# EAGLE board MechModule (EAGLE 6.6.0)
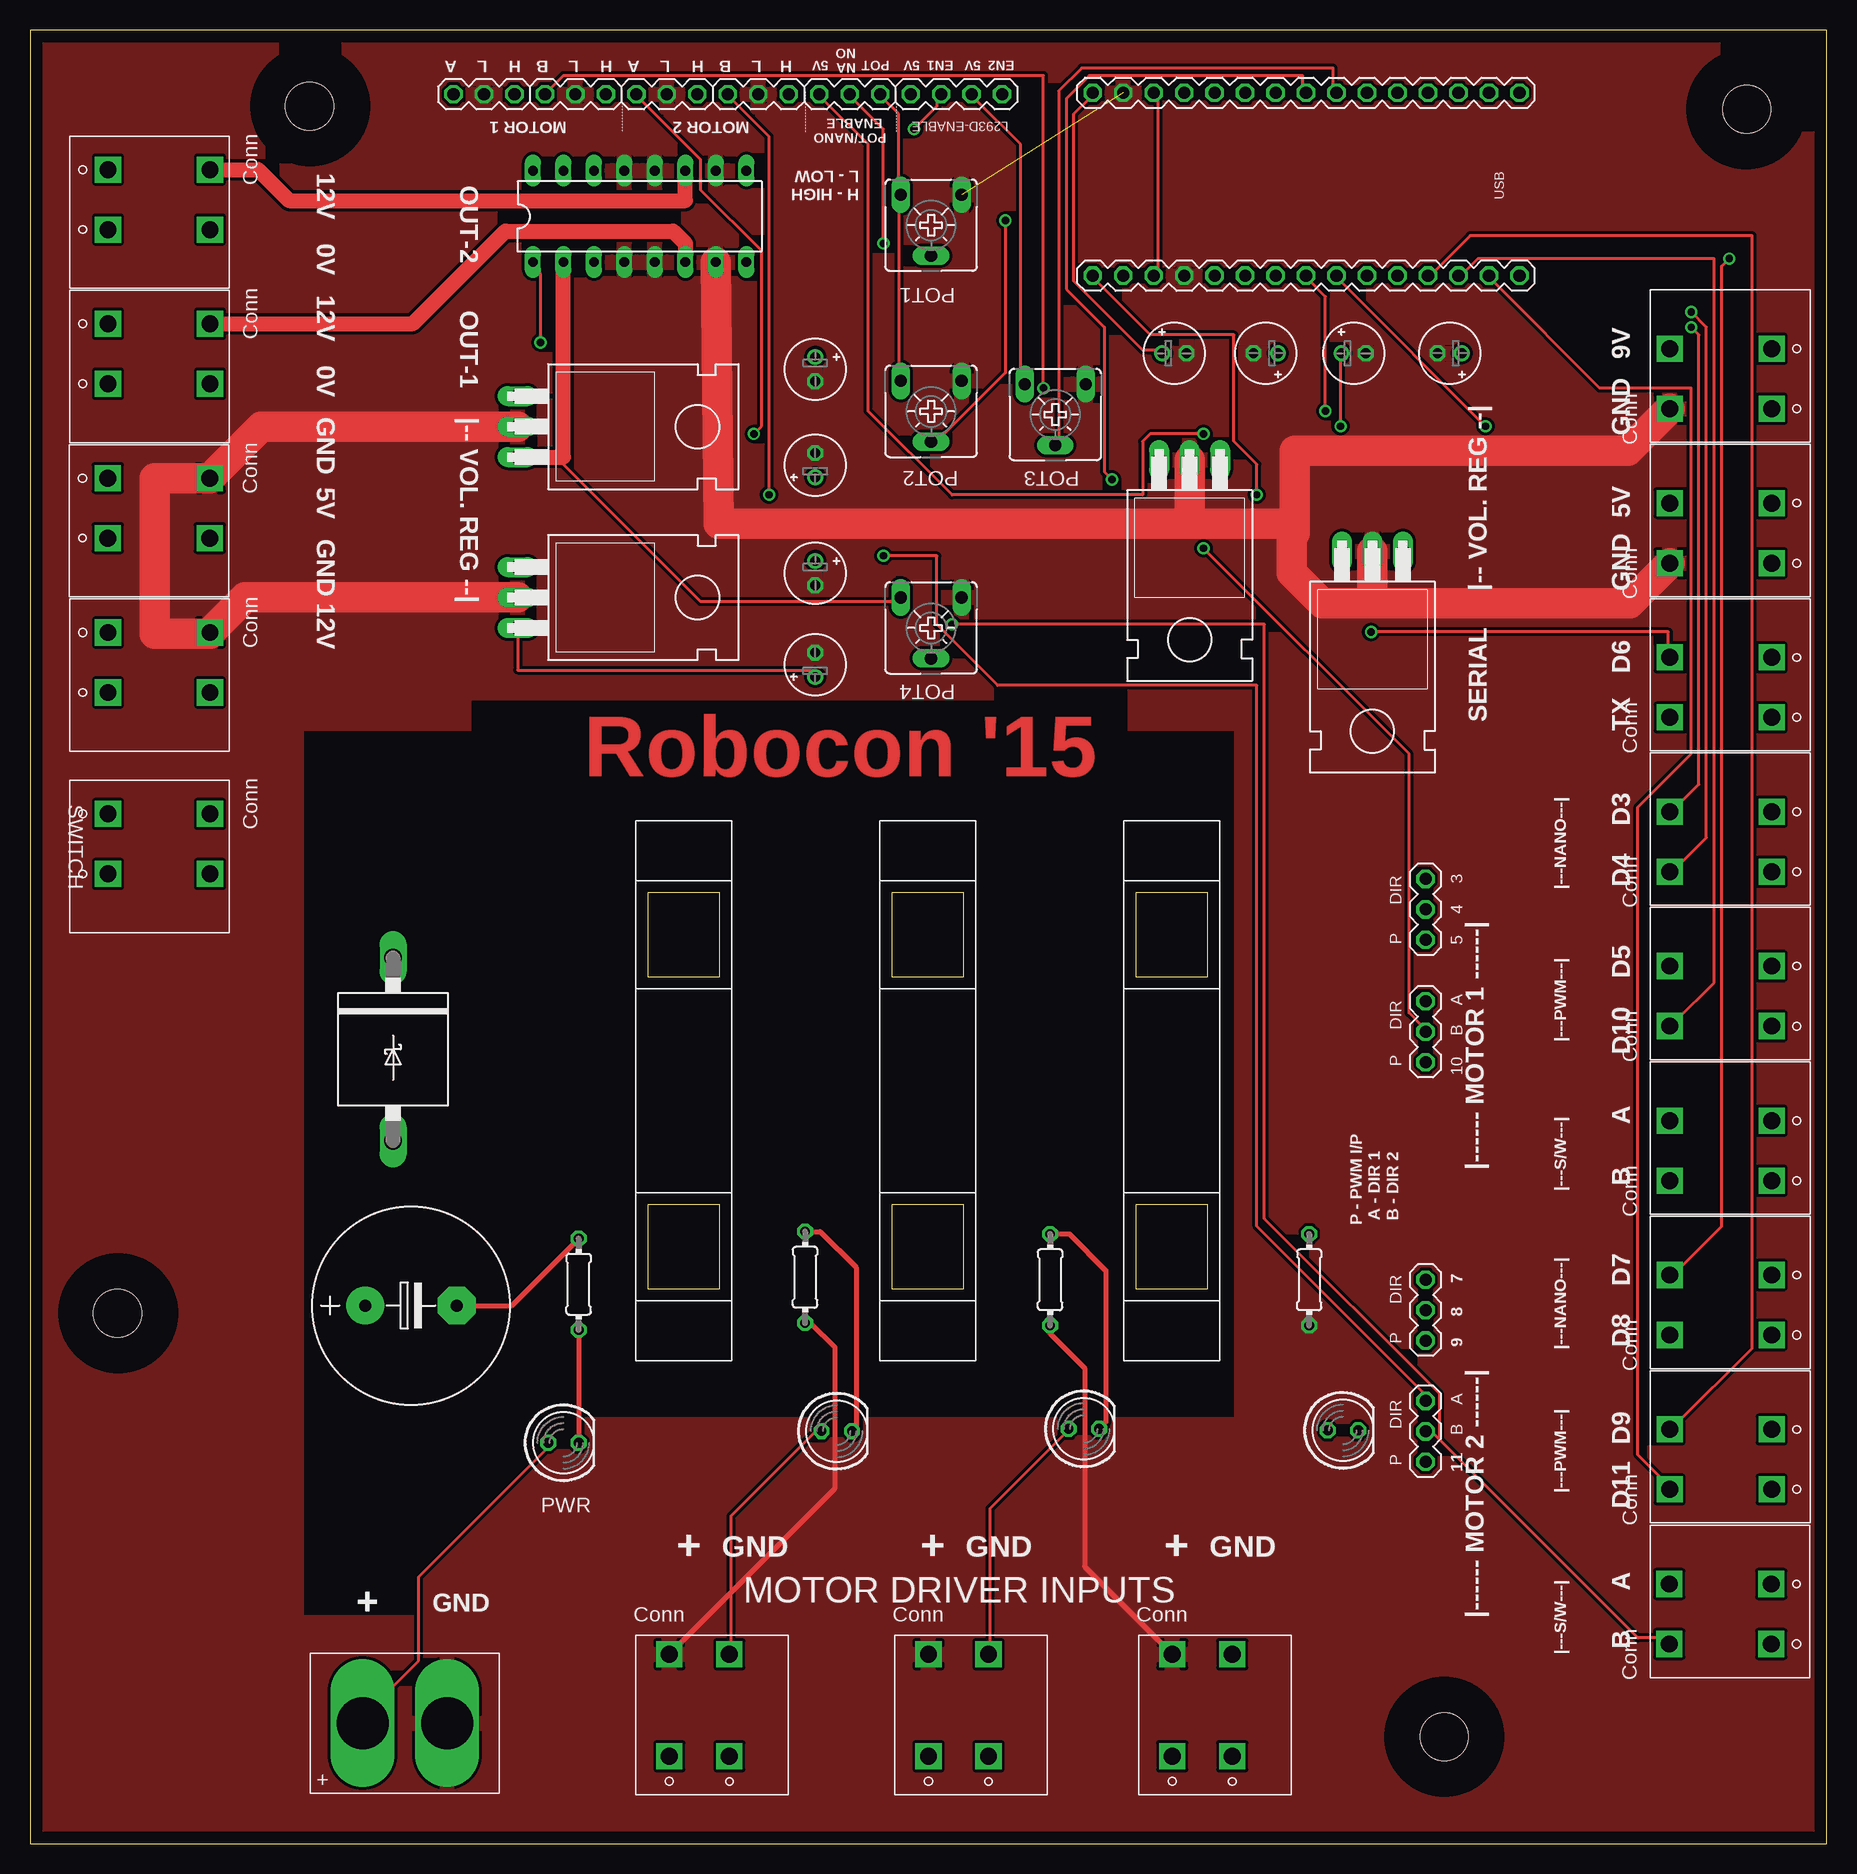
[diagram p0: board, top side]
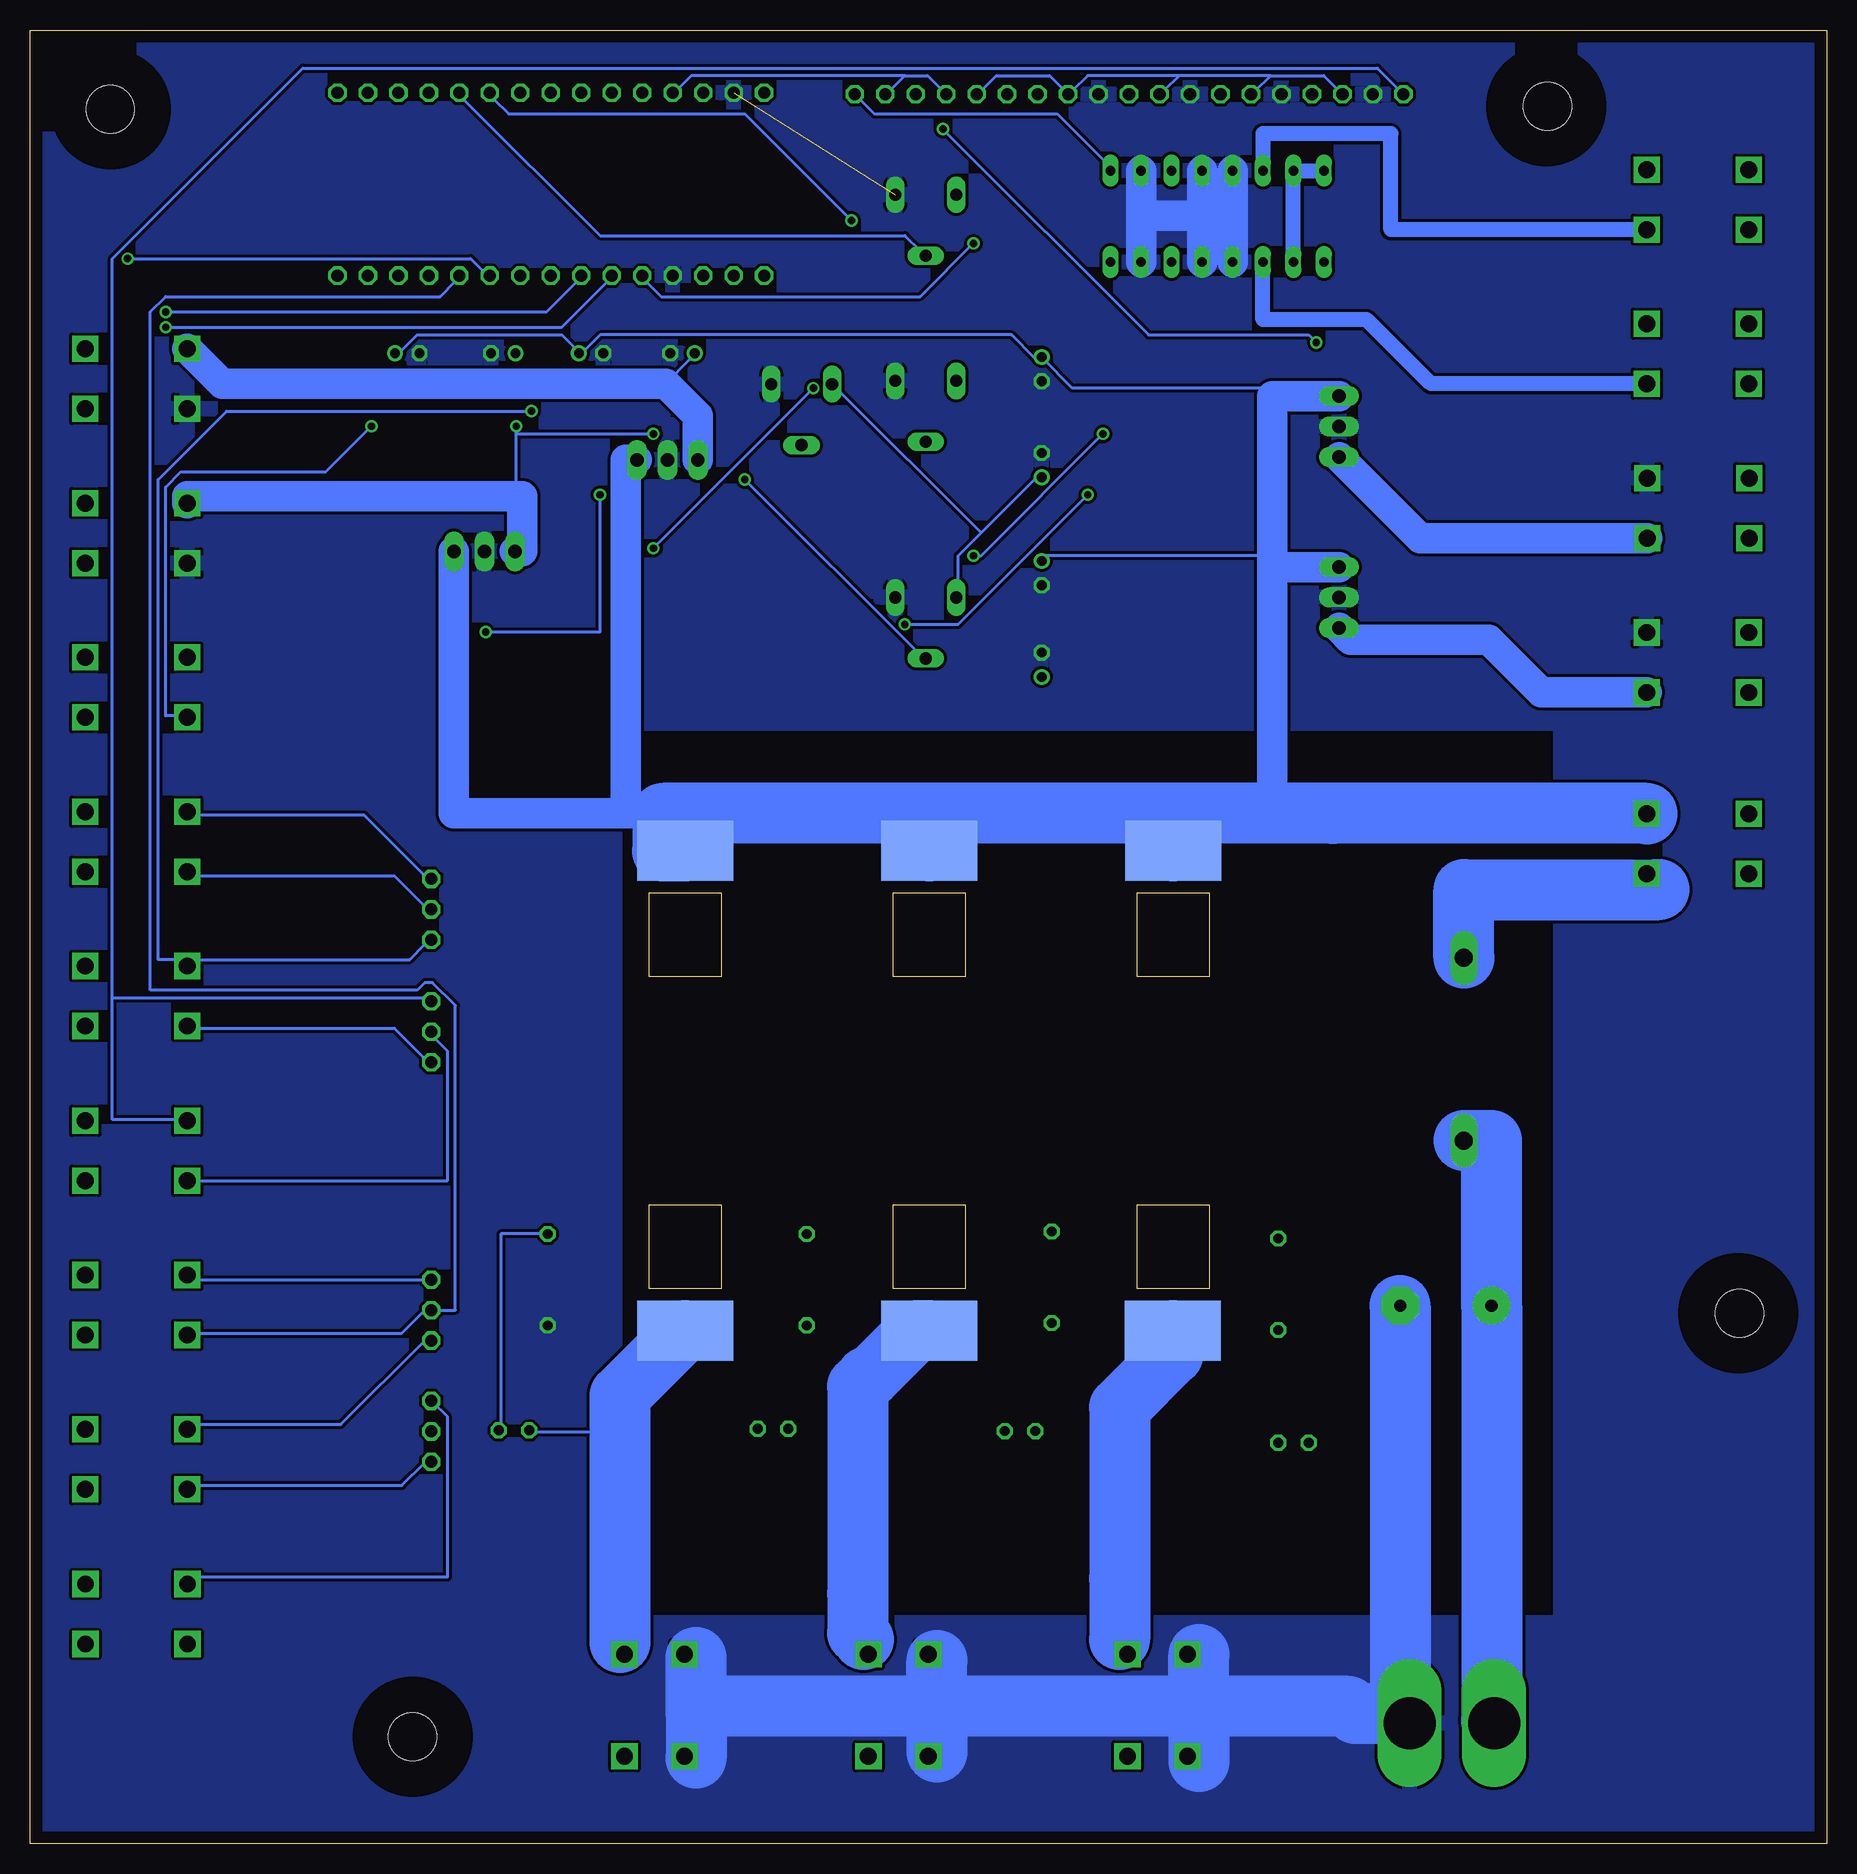
[diagram p1: board, bottom side, seen from below]

Size 149.74 x 151.13 mm. Coordinates in mm from the lower left corner, seen from the top.
Outline: 0,0 149.74,0 149.74,151.13 0,151.13 0,0
Copper layers (1*16): Top 0.035mm / dielectric 1.5mm / Bottom 0.035mm
Design rules "default *": minimum track width 10mil, minimum drill 24mil, track to track 10mil, track to pad 10mil, pad to pad 10mil, via to via 10mil, smd to smd 6mil, copper to edge 40mil, drill to drill 8mil, minimum pad ring 10mil, minimum via ring 8mil, stop-mask expansion 4mil, vias tented up to drill 0mil, thermal gap 10mil
Net classes: 1 24V|GND: width 5.08 mm, drill 0.61 mm, clearance 0.381 mm
Holes 4 mm at 143.05,144.53 23.29,144.78 117.86,8.89 7.29,44.2
tRestrict: area 138,139.5 to 148,149.5; area 18.4,139.8 to 28.4,149.8; area 112.9,3.9 to 122.9,13.9; area 22.9,35.6 to 100.3,92.7; area 22.9,19.1 to 31.8,35.6; area 36.8,87.6 to 91.4,95.2; area 2.4,39.2 to 12.4,49.2
bRestrict: area 22.9,19.1 to 100.3,92.7; area 138,139.5 to 148,149.5; area 18.4,139.8 to 28.4,149.8; area 112.9,3.9 to 122.9,13.9; area 2.4,39.2 to 12.4,49.2

## Footprints (pad centres in the part's own frame; a part is rotated, then mirrored left to right if it is on the bottom)
STANDARD = drill 1.4 pad 2.184 square: 1 -2.28,-3.15; 2 2.72,-3.15; 3 2.72,5.35; 4 -2.28,5.35
E2-5 = drill 0.813 pad 1.27: + -1.016,0 | drill 0.813 pad 1.27 octagon: - 1.016,0
E7,5-16 = drill 1.016 pad 3.15: + -3.81,0 | drill 1.016 pad 3.15 octagon: - 3.81,0
P6T15 = drill 1.499 long: A 7.62,0; C -7.62,0
MA04-1 = drill 1.016 octagon: 1 -3.81,0; 2 -1.27,0; 3 1.27,0; 4 3.81,0
MA03-1 = drill 1.016 octagon: 1 -2.54,0; 2 0,0; 3 2.54,0
CPT-FUSES = smd 5 x 8 bottom: P$1 -19.492,0.039; P$2 20.502,0.055
78XX = drill 1.118 long: 1 -2.54,-8.89; 2 0,-8.89; 3 2.54,-8.89
DIL16 = drill 0.813 long: 1 -8.89,-3.81; 2 -6.35,-3.81; 3 -3.81,-3.81; 4 -1.27,-3.81; 5 1.27,-3.81; 6 3.81,-3.81; 7 6.35,-3.81; 8 8.89,-3.81; 9 8.89,3.81; 10 6.35,3.81; 11 3.81,3.81; 12 1.27,3.81; 13 -1.27,3.81; 14 -3.81,3.81; 15 -6.35,3.81; 16 -8.89,3.81
SCREW_XT-60 = drill 4.318 long: P$1 -3.524,0; P$2 3.524,0
LED5MM = drill 0.813 octagon: A -1.27,0; K 1.27,0
ARD-NANO = drill 1.016 octagon: 3V3 7.62,-15.24; 5V 7.62,10.16; A0 7.62,-10.16; A1 7.62,-7.62; A2 7.62,-5.08; A3 7.62,-2.54; A4 7.62,0; A5 7.62,2.54; A6 7.62,5.08; A7 7.62,7.62; AREF 7.62,-12.7; D2 -7.62,7.62; D3 -7.62,5.08; D4 -7.62,2.54; D5 -7.62,0; D6 -7.62,-2.54; D7 -7.62,-5.08; D8 -7.62,-7.62; D9 -7.62,-10.16; D10 -7.62,-12.7; D11 -7.62,-15.24; D12 -7.62,-17.78; D13 7.62,-17.78; GND1 -7.62,10.16; GND2 7.62,15.24; RST1 -7.62,12.7; RST2 7.62,12.7; RX -7.62,15.24; TX -7.62,17.78; VIN 7.62,17.78
CA6V = drill 1.016 long: A -2.54,-2.54; E 2.54,-2.54; S 0,2.54
0204/7 = drill 0.813 octagon: 1 -3.81,0; 2 3.81,0

## Placement (x,y rotation side)
5V1  SCREWCONN  [STANDARD]  141.99,108.98 90 top
5V2  SCREWCONN  [STANDARD]  9.63,111.51 270 top
9V  SCREWCONN  [STANDARD]  141.99,121.85 90 top
12V  SCREWCONN  [STANDARD]  9.65,98.64 270 top
C1  [E2-5]  110.3,124.19 0 top
C2  [E2-5]  118.3,124.19 180 top
C4  [E2-5]  65.43,122.87 270 top
C5  [E2-5]  65.43,114.87 90 top
C8  [E2-5]  95.36,124.19 0 top
C9  [E2-5]  102.98,124.19 180 top
C12  [E2-5]  65.43,98.23 90 top
C13  [E2-5]  65.43,105.87 270 top
C14  [E7,5-16]  31.75,44.83 0 top
D1  [P6T15]  30.25,66.19 270 top
DCV  MA04-1  [MA04-1]  77.2,145.78 0 top
EN-NANO  [MA03-1]  68.31,145.78 0 top
FUSE1  CPT-FUSE  [CPT-FUSES]  54.53,62.23 90 top
FUSE2  CPT-FUSE  [CPT-FUSES]  74.85,62.23 90 top
FUSE3  CPT-FUSE  [CPT-FUSES]  95.17,62.23 90 top
IC1  7805  [78XX]  49.53,118.08 270 top
IC2  7805  [78XX]  111.87,98.79 180 top
IC3  7812  [78XX]  49.53,103.84 270 top
IC5  7809  [78XX]  96.63,106.41 180 top
IC6  L293D  [DIL16]  50.8,135.6 0 top
LIPO  SCREW_XT-60  [SCREW_XT-60]  31.24,10.03 0 top
M1  [LED5MM]  67.23,34.37 0 top
M1D1  [MA03-1]  37.83,145.78 0 top
M1D2  [MA03-1]  45.45,145.78 0 top
M1DH  SCREWCONN  [STANDARD]  141.99,57.52 90 top
M1DS  SCREWCONN  [STANDARD]  141.99,83.27 90 top
M1H  [MA03-1]  116.3,67.65 270 top
M1P  SCREWCONN  [STANDARD]  141.99,70.4 90 top
M1S  [MA03-1]  116.3,77.85 270 top
M2  [LED5MM]  87.82,34.56 0 top
M2D1  [MA03-1]  53.07,145.78 0 top
M2D2  [MA03-1]  60.69,145.78 0 top
M2DH  SCREWCONN  [STANDARD]  141.96,18.91 90 top
M2DS  SCREWCONN  [STANDARD]  141.99,44.66 90 top
M2H  [MA03-1]  116.3,34.35 270 top
M2P  SCREWCONN  [STANDARD]  141.99,31.8 90 top
M2S  [MA03-1]  116.3,44.45 270 top
M3  [LED5MM]  109.41,34.43 0 top
MD1  SCREWCONN  [STANDARD]  55.56,10.43 0 top
MD2  SCREWCONN  [STANDARD]  77.15,10.43 0 top
MD3  SCREWCONN  [STANDARD]  97.47,10.43 0 top
NANO  ARD-NANO  [ARD-NANO]  106.34,138.28 90 top
OUT1  SCREWCONN  [STANDARD]  9.65,124.37 270 top
OUT2  SCREWCONN  [STANDARD]  9.65,137.22 270 top
POT1  [CA6V]  75.09,134.86 180 top
POT2  [CA6V]  75.09,119.35 180 top
POT3  [CA6V]  85.44,119.08 180 top
POT4  [CA6V]  75.09,101.3 180 top
PWR  [LED5MM]  44.45,33.4 0 top
R1  [0204/7]  106.6,46.99 90 top
R3  [0204/7]  85.01,46.99 90 top
R4  [0204/7]  64.59,47.19 90 top
R5  [0204/7]  45.72,46.61 270 top
SERIAL  SCREWCONN  [STANDARD]  141.99,96.13 90 top
SWITCH  SCREWCONN  [STANDARD]  9.65,83.53 270 top

## Library data of the parts
5V1 5V2 9V 12V M1DH M1DS M1P M2DH M2DS M2P MD1-MD3 OUT1 OUT2 SERIAL SWITCH = sptb
C1 C2 C4 C5 C8 C9 C12-C14 R1 R3-R5 = rcl
D1 = diode
DCV = 00-con-lstb_edited
EN-NANO M1D1 M1D2 M1H M1S M2D1 M2D2 M2H M2S = 00-con-lstb_edited; OC_FARNELL: unknown; OC_NEWARK: unknown
FUSE1-FUSE3 IC1-IC3 IC5 LIPO NANO = #rcn-15
IC6 = st-microelectronics; MPN: L293D; OC_FARNELL: 9589619; OC_NEWARK: 56P8249
M1-M3 PWR = led
POT1-POT4 = pot

## Nets
3V3: NANO.3V3
5V: 5V2.3 C5.+ DCV.1 DCV.3 IC1.3 IC6.2 IC6.15 IC6.16 NANO.5V POT3.E POT4.E
5VA: 5V1.3 C1.+ EN-NANO.1 IC2.3
5VB: EN-NANO.3 M1D1.3 M1D2.3 M2D1.3 M2D2.3 POT1.E POT2.E
9V: 9V.3 C8.+ IC5.3 NANO.VIN
12V: IC6.8
+24: C14.+ D1.A LIPO.P$1 PWR.A
A0: NANO.A0
A1: NANO.A1 POT1.S
A2: NANO.A2 POT2.S
A3: NANO.A3 POT3.S
A4: NANO.A4 POT4.S
A5: NANO.A5
A6: NANO.A6
A7: NANO.A7
AREF: NANO.AREF
D2: EN-NANO.2 NANO.D2
D3: M1DS.3 M1S.1 NANO.D3
D4: M1DS.4 M1S.2 NANO.D4
D5: M1P.3 M1S.3 NANO.D5
D6: NANO.D6 SERIAL.4
D7: M2DS.3 M2S.1 NANO.D7
D8: M2DS.4 M2S.2 NANO.D8
D9: M2P.3 M2S.3 NANO.D9
D10: M1H.3 M1P.4 NANO.D10
D11: M2H.3 M2P.4 NANO.D11
D12: NANO.D12
D13: NANO.D13
EN1: DCV.2 IC6.1
EN2: DCV.4 IC6.9
FUSE1: FUSE1.P$1 M1.A MD1.3
FUSE2: FUSE2.P$1 M2.A MD2.3
FUSE3: FUSE3.P$1 M3.A MD3.3
GND: 5V1.4 5V2.4 9V.4 12V.4 C1.- C2.- C4.- C5.- C8.- C9.- C12.- C13.- C14.- IC1.2 IC2.2 IC3.2 IC5.2 IC6.4 IC6.5 IC6.7 IC6.10 IC6.12 IC6.13 LIPO.P$2 M1D1.2 M1D2.2 M2D1.2 M2D2.2 MD1.4 MD2.4 MD3.4 NANO.GND1 NANO.GND2 POT1.A POT2.A POT3.A POT4.A R1.1 R3.1 R4.1 R5.1
M1D1: M1D1.1 M1DH.3 M1H.1
M1D2: M1D2.1 M1DH.4 M1H.2
M2D1: M2D1.1 M2DH.3 M2H.1
M2D2: M2D2.1 M2DH.4 M2H.2
N$1: D1.C SWITCH.3
N$2: M3.K R1.2
N$3: M2.K R3.2
N$4: M1.K R4.2
N$5: PWR.K R5.2
OUTA1: IC6.3 OUT1.3
OUTA2: IC6.6 OUT1.4
OUTA3: IC6.14 OUT2.3
OUTA4: IC6.11 OUT2.4
RESET: NANO.RST1 NANO.RST2
RX: NANO.RX
S$1: 12V.3 C12.+ IC3.3
TX: NANO.TX SERIAL.3
VCC: C2.+ C4.+ C9.+ C13.+ FUSE1.P$2 FUSE2.P$2 FUSE3.P$2 IC1.1 IC2.1 IC3.1 IC5.1 SWITCH.4

## Tracks (layer width: path | path; a pad name or v marks a point on that pad's centre or on a via)
5V
  Top 0.254: DCV.3 78.74,145.41 82.55,141.61 82.55,121.92 POT3.E | 44.45,115.54 44.45,114.94 55.88,103.5 72.39,103.5 POT4.E
  Top 1.27: IC1.3 44.45,115.54 IC6.2
  Bottom 0.254: DCV.1 74.93,147.32 76.84,147.32 | 76.84,147.32 78.1,146.05 DCV.3 | 76.84,147.32 94.61,147.32 95.89,146.05 NANO.5V | 70.48,109.22 72.39,107.31 72.39,104.14 POT4.E | 70.48,109.22 66.04,113.66 C5.+ | 70.48,109.22 82.55,121.28 POT3.E
  Bottom 1.27: IC6.2 IC6.15 IC6.16
  Bottom 2.54: 5V2.3 33.89,108.79 IC1.3
5VA  (via drill 0.61)
  Top 0.254: v109.22,118.11 109.22,123.83 C1.+ | v97.79,117.47 93.34,117.47 92.71,116.84 92.71,112.39 76.84,112.39 69.85,119.38 69.85,141.61 66.04,145.41 EN-NANO.1
  Bottom 0.254: 109.22,117.47 109.22,113.03 108.71,112.27 | 109.22,117.47 v109.22,118.11 | 109.22,117.47 v97.79,117.47
  Bottom 2.54: IC2.3 108.71,107.68 108.71,112.27 136.64,112.27 5V1.3
5VB
  Top 0.254: EN-NANO.3 71.12,145.41 72.39,144.15 72.39,137.8 POT1.E 72.39,137.16 72.39,121.92 POT2.E
  Bottom 0.254: M1D1.3 41.91,147.32 46.36,147.32 | 46.36,147.32 47.62,146.05 M1D2.3 | 53.97,147.32 55.24,146.05 M2D1.3 | 46.36,147.32 53.97,147.32 | 53.97,147.32 61.59,147.32 62.87,146.05 M2D2.3 64.77,147.32 69.22,147.32 70.48,146.05 EN-NANO.3
9V
  Top 0.254: NANO.VIN 88.27,145.41 87,144.15 87,130.18 92.71,124.46 93.98,124.46 C8.+
  Bottom 0.254: 96.77,121.67 94.61,123.83 C8.+
  Bottom 2.54: IC5.3 94.09,118.98 96.77,121.67 133.74,121.67 9V.3
+24
  Top 0.254: PWR.A 43.18,33.02 32.38,22.23 32.38,15.24 27.94,10.79 27.94,10.16 LIPO.P$1
  Bottom 5.08: LIPO.P$1 27.94,10.25 C14.+ 27.94,58.57 D1.A
A1
  Bottom 0.254: POT1.S 75.56,132.72 76.84,133.99 102.23,133.99 113.67,145.41 NANO.A1
A2  (via drill 0.61)
  Top 0.254: v81.28,135.25 81.28,122.55 75.56,116.84 POT2.S
  Bottom 0.254: v81.28,135.25 90.17,144.15 109.86,144.15 111.12,145.41 NANO.A2
A3
  Top 0.254: POT3.S 85.72,116.84 85.72,146.05 87.63,147.96 108.58,147.96 108.58,146.05 NANO.A3
A4  (via drill 0.61)
  Top 0.254: v90.17,113.66 89.53,114.3 89.53,126.36 86.36,129.54 86.36,145.41 88.27,147.32 106.05,147.32 106.05,146.05 NANO.A4
  Bottom 0.254: v90.17,113.66 75.56,99.06 POT4.S
D2  (via drill 0.61)
  Top 0.254: v71.12,133.35 71.12,142.88 68.58,145.41 EN-NANO.2
  Bottom 0.254: v71.12,133.35 75.56,128.91 97.16,128.91 98.42,130.18 NANO.D2
D3  (via drill 0.61)
  Top 0.254: v138.43,126.36 139.06,125.73 139.06,88.27 137.16,86.36 M1DS.3
  Bottom 0.254: M1S.1 116.84,80.64 121.92,85.72 136.53,85.72 M1DS.3 | v138.43,126.36 105.41,126.36 101.6,130.18 NANO.D3
D4  (via drill 0.61)
  Top 0.254: v138.43,127.63 139.7,126.36 139.7,83.82 137.16,81.28 M1DS.4
  Bottom 0.254: M1S.2 116.84,78.11 119.38,80.64 136.53,80.64 M1DS.4 | v138.43,127.63 106.68,127.63 104.14,130.18 NANO.D4
D5  (via drill 0.61)
  Top 0.254: v107.95,119.38 107.95,128.91 106.68,130.18 NANO.D5
  Bottom 0.254: M1S.3 116.84,74.93 118.11,73.66 136.53,73.66 M1P.3 137.16,73.66 139.06,73.66 139.06,113.66 133.35,119.38 v107.95,119.38
D6  (via drill 0.61)
  Top 0.254: v121.28,118.11 109.22,130.18 NANO.D6
  Bottom 0.254: v121.28,118.11 125.09,114.3 137.16,114.3 138.43,113.03 138.43,93.98 137.16,93.98 SERIAL.4
D7  (via drill 0.61)
  Top 0.254: v141.61,132.08 140.97,131.44 140.97,51.44 137.16,47.62 M2DS.3
  Bottom 0.254: M2S.1 136.53,46.99 M2DS.3 | v141.61,132.08 113.03,132.08 111.76,130.81 NANO.D7
D8
  Bottom 0.254: M2DS.4 136.53,42.55 118.75,42.55 116.84,44.45 M2S.2 114.3,44.45 114.3,69.85 116.2,71.75 116.84,71.75 117.47,71.12 139.7,71.12 139.7,127.63 138.43,128.91 115.57,128.91 114.3,130.18 NANO.D8
D9
  Top 0.254: NANO.D9 116.84,130.81 120.02,133.99 143.51,133.99 143.51,41.28 137.16,34.92 M2P.3
  Bottom 0.254: M2S.3 116.84,41.91 123.83,34.92 136.53,34.92 M2P.3
D10
  Top 0.254: NANO.D10 119.38,130.81 120.65,132.08 140.33,132.08 140.33,71.75 137.16,68.58 M1P.4
  Bottom 0.254: M1H.3 116.84,65.41 119.38,67.95 136.53,67.95 M1P.4
D11
  Top 0.254: NANO.D11 121.92,130.18 130.81,121.28 138.43,121.28 138.43,90.8 133.99,86.36 133.99,32.39 136.53,29.84 M2P.4
  Bottom 0.254: M2H.3 116.84,31.75 118.75,29.84 136.53,29.84 M2P.4
EN1  (via drill 0.61)
  Top 0.254: v42.55,125.09 42.55,130.81 41.91,131.44 IC6.1 | v73.66,142.88 75.56,144.78 75.56,145.41 DCV.2
  Bottom 0.254: v42.55,125.09 43.18,125.73 56.52,125.73 v73.66,142.88
EN2
  Bottom 0.254: DCV.4 79.38,144.15 64.13,144.15 59.69,139.7 IC6.9
FUSE1
  Top 0.254: M1.A 65.41,34.29 58.42,27.3 58.42,15.88 MD1.3
  Bottom 0.406: MD1.3 58.28,21.45 58.93,22.1
  Bottom 5.08: FUSE1.P$1 54.49,40.76 58.93,36.32 58.93,22.1 58.93,17.02
FUSE2
  Top 0.254: M2.A 86.36,34.29 80.01,27.94 80.01,15.88 MD2.3
  Bottom 0.406: MD2.3 79.87,19.93 80.77,20.83
  Bottom 5.08: FUSE2.P$1 75.88,42.74 79.76,38.86 80.01,38.86 80.77,38.1 80.77,20.83 80.77,17.53 80.26,17.02
FUSE3
  Bottom 0.254: 100.58,34.29 107.95,34.29 M3.A
  Bottom 0.406: MD3.3 101.63,15.78 | 101.63,15.78 102.36,16.51 | 101.63,15.78 100.58,14.73 100.58,15.24 100.08,15.75 100.33,15.75 100.84,15.24 100.84,17.53 99.82,18.54 99.82,27.18 100.58,27.94
  Bottom 5.08: FUSE3.P$1 95.18,42.74 100.58,37.34 100.58,34.29 100.58,27.94 100.58,16.76
GND  (1 unrouted)
  Top 0.406: C14.- 40.13,44.83 R5.1 | R4.1 65.08,43.38 67.06,41.4 67.06,29.55 MD1.4 | R3.1 85.01,42.5 87.88,39.62 87.88,23.09 MD3.4
  Top 2.54: IC3.2 17.92,103.84 12V.4 15,100.84 10.41,100.84 10.41,113.79 5V2.4 19.27,118.08 IC1.2 | IC6.7 57.4,109.98 97.03,109.98 | 97.03,109.98 105.16,109.98 105.16,109.22 | 105.16,109.22 105.16,105.92 107.7,103.38 112.01,103.38 | 112.01,103.38 133.31,103.38 5V1.4 | IC2.2 111.87,103.52 112.01,103.38 | IC5.2 96.63,110.38 97.03,109.98 | 9V.4 133.15,116.08 105.41,116.08 105.41,109.22 105.16,109.22
  Bottom 0.406: MD3.4 94.23,14.82 94.23,10.92 | MD2.4 73.82,14.73 73.41,14.73 73.66,14.48 73.66,14.22 74.68,15.24 74.68,15.75 74.17,15.24 | 52.32,15.75 52.36,15.78 MD1.4
  Bottom 2.54: IC6.13 IC6.4 | IC6.12 52.07,135.64 | 52.07,135.64 IC6.5 | IC6.7 IC6.10 57.15,135.64 52.07,135.64
  Bottom 5.08: C14.- 35.56,10.83 | 35.56,10.83 LIPO.P$2 | 35.56,10.83 39.27,10.83 39.88,11.43 52.32,11.43 | 52.32,11.43 74.17,11.43 | 74.93,11.43 94.23,11.43 | 74.17,11.43 74.93,11.43 | 74.93,11.43 74.36,12 74.17,12 74.17,15.24 | 94.23,11.43 94.23,15.49 | 94.23,11.43 94.23,10.92 94.23,7.11 | 74.17,11.43 74.17,7.62 | 52.32,11.18 52.32,11.43 | 52.32,11.43 52.32,15.75 | 52.58,11.18 52.32,11.18 | 52.32,11.18 52.32,6.86
  pour Bottom: 0,0 149.73,0 149.73,151.13 0,151.13
  pour Top: 0,0 149.74,0 149.74,151.13 0,151.13
M1D1
  Bottom 0.254: M1D1.1 37.47,147.96 127,147.96 142.88,132.08 142.88,70.48 | 142.88,70.48 142.88,60.33 137.16,60.33 M1DH.3 | 142.88,70.48 116.84,70.48 M1H.1
M1D2  (via drill 0.61)
  Top 0.254: M1D2.1 44.45,147.32 84.45,147.32 v84.45,121.28 | v97.79,107.95 114.94,90.8 114.94,69.22 116.2,67.95 M1H.2
  Bottom 0.254: M1H.2 116.2,67.31 114.94,66.04 114.94,55.25 136.53,55.25 M1DH.4 | v97.79,107.95 v84.45,121.28
M2D1  (via drill 0.61)
  Top 0.254: v60.33,117.47 60.96,118.11 60.96,132.72 55.88,137.8 55.88,140.34 50.8,145.41 M2D1.1 | v71.12,107.31 75.56,107.31 75.56,101.6 80.64,96.52 102.23,96.52 102.23,51.44 116.2,37.47 M2H.1
  Bottom 0.254: M2H.1 116.2,36.83 114.94,35.56 114.94,22.23 136.53,22.23 M2DH.3 | v60.33,117.47 70.48,107.31 v71.12,107.31
M2D2  (via drill 0.61)
  Top 0.254: 117.47,33.66 133.99,17.14 136.53,17.14 M2DH.4 | 117.47,33.66 116.84,34.29 M2H.2 | v61.59,112.39 61.59,142.24 58.42,145.41 M2D2.1 | v76.84,101.6 102.87,101.6 102.87,52.07 117.47,37.47 117.47,33.66
  Bottom 0.254: v61.59,112.39 72.39,101.6 v76.84,101.6
N$1
  Bottom 0.406: SWITCH.3 15,79.5 14.22,79.5
  Bottom 5.08: D1.C 30.25,79.5 14.22,79.5 13.97,79.5
N$2
  Bottom 0.254: R1.2 110.49,50.8 110.49,34.92 M3.K
N$3
  Top 0.406: R3.2 86.61,50.8 89.66,47.75 89.66,35.13 M2.K
N$4
  Top 0.406: R4.2 65.84,51 68.83,48.01 68.83,34.7 M1.K
N$5
  Top 0.406: R5.2 PWR.K
OUTA1
  Bottom 1.27: OUT1.3 33.01,121.65 38.35,127 46.99,127 IC6.3
OUTA2
  Top 1.27: OUT1.4 31.91,126.65 39.62,134.37 53.59,134.37 54.61,133.35 IC6.6
OUTA3
  Bottom 1.27: OUT2.3 36.32,134.5 36.32,142.49 46.99,142.49 IC6.14
OUTA4
  Top 1.27: OUT2.4 19,139.5 21.59,136.91 54.61,136.91 IC6.11
RESET
  Top 0.254: NANO.RST1 93.98,130.81 93.98,145.41 NANO.RST2
S$1
  Top 0.254: IC3.3 40.64,97.79 65.41,97.79 C12.+
  Bottom 2.54: 12V.3 23.79,95.92 28.19,100.33 39.67,100.33 IC3.3
TX  (via drill 0.61)
  Top 0.254: v102.23,112.39 102.23,114.94 100.33,116.84 100.33,125.73 93.34,125.73 88.9,130.18 NANO.TX | v111.76,100.97 136.53,100.97 136.53,99.06 SERIAL.3
  Bottom 0.254: v102.23,112.39 102.23,100.97 v111.76,100.97
VCC
  Bottom 0.254: C2.+ 118.75,124.46 117.47,125.73 105.41,125.73 104.14,124.46 C9.+ 103.5,124.46 102.23,125.73 67.94,125.73 66.04,123.83 C4.+ 65.41,123.83 62.87,121.28 46.99,121.28 46.23,120.62 | C13.+ 65.41,107.31 46.99,107.31 46.23,106.38
  Bottom 2.54: 97.03,85.85 100.08,85.85 | 100.08,85.85 114.41,85.85 IC2.1 | IC5.1 100.08,115.3 100.08,85.85 | IC3.1 46.23,106.38 | 46.23,106.38 46.23,85.09 40.64,85.09 40.64,86.61 41.15,86.61 41.15,85.85 | IC1.1 46.23,120.62 46.23,106.38
  Bottom 5.08: SWITCH.4 15,85.85 41.15,85.85 54.47,85.85 | 54.47,85.85 74.8,85.85 | 74.8,85.85 97.03,85.85 97.03,82.73 FUSE3.P$2 | FUSE2.P$2 74.8,85.85 | FUSE1.P$2 54.47,85.85

## Text on the board
Top: Robocon '15
tNames: NA / NO | A | L | H | B | L | H | A | L | H | B | L | H | 5V | POT | 5V | EN1 | 5V | EN2 | POT/NANO / ENABLE | MOTOR 1 | -------------- | MOTOR 2 | -------------- | -------------- | L293D-ENABLE | 12V | H - HIGH / L - LOW | OUT-2 | 0V | 12V | OUT-1 | 9V | 0V | GND | |-- VOL. REG --| | GND | 5V | 5V | GND | |-- VOL. REG --| | GND | 12V | D6 | SERIAL | TX | D3 | 3 | D4 | |---NANO---| | DIR | 4 | P | 5 | D5 | A | DIR | B | |---PWM---| | D10 | P | 10 | A | |------ MOTOR 1 ------| | B | |---S/W---| | P - PWM I/P / A - DIR 1 / B - DIR 2 | 7 | D7 | DIR | 8 | P | 9 | |---NANO---| | D8 | A | DIR | B | D9 | P | 11 | |---PWM---| | D11 | + | GND | + | GND | + | GND | A | MOTOR DRIVER INPUTS | + | GND | |------ MOTOR 2 ------| | |---S/W---| | B
Reference: 2.5A | 2.1A | 2.1A | 2.1A | 2.1A | 4.2A | 4.2A | 15A | 15A | 15A | 8.4A